# EAGLE board Cap-Audyn-Sn (EAGLE 3.55)

No outline drawn. Coordinates in mm, seen from the top.
Copper layers used: 

## Footprints (pad centres in the part's own frame; a part is rotated, then mirrored left to right if it is on the bottom)
*9 = drill 0.813 pad 1.778 octagon:  -12.5,0;  12.5,0
*11 = drill 0.813 pad 1.778 octagon:  -12.5,0;  12.5,0
*10 = drill 1.27 pad 2.54 octagon:  -15.5,0;  15.5,0
*12,5 = drill 1.27 pad 2.54 octagon:  -15.5,0;  15.5,0
*13 = drill 0.813 pad 1.778 octagon:  -15,0;  15,0
*14,5 = drill 1.27 pad 2.54 octagon:  -15.5,0;  15.5,0
*15 = drill 1.27 pad 2.54 octagon:  -15.5,0;  15.5,0
*15,5 = drill 1.27 pad 2.54 octagon:  -15.5,0;  15.5,0
*16 = drill 1.27 pad 2.54 octagon:  -18.5,0;  18.5,0
*19 = drill 1.27 pad 2.54 octagon:  -18.5,0;  18.5,0
*15,1 = drill 1.27 pad 2.54 octagon:  -20.5,0;  20.5,0
*17,5 = drill 1.27 pad 2.54 octagon:  -20.5,0;  20.5,0
*18 = drill 1.27 pad 2.54 octagon:  -21,0;  21,0
*20 = drill 1.27 pad 2.54 octagon:  -20.5,0;  20.5,0
*21,5 = drill 1.27 pad 2.54 octagon:  -20.5,0;  20.5,0
*21 = drill 1.27 pad 2.54 octagon:  -21,0;  21,0
*22 = drill 1.27 pad 2.54 octagon:  -21,0;  21,0
*24 = drill 1.27 pad 2.54 octagon:  -21,0;  21,0
*25 = drill 1.27 pad 2.54 octagon:  -21,0;  21,0

## Placement (x,y rotation side)
23*9  [*9]  25.4,238.76 0 top
23*11  [*11]  26.67,62.23 0 top
28*10  [*10]  57.15,238.76 0 top
28*12,5  [*12,5]  91.44,238.76 0 top
28*13  [*13]  58.42,62.23 0 top
28*14,5  [*14,5]  125.73,238.76 0 top
28*15  [*15]  160.02,238.76 0 top
28*15,5  [*15,5]  92.71,62.23 0 top
34*16  [*16]  30.48,218.44 0 top
34*19  [*19]  113.03,218.44 0 top
35*16  [*16]  72.39,218.44 0 top
38*15,1  [*15,1]  132.08,62.23 0 top
38*17,5  [*17,5]  156.21,218.44 0 top
38*18  [*18]  34.29,39.37 0 top
38*20  [*20]  33.02,194.31 0 top
38*21,5  [*21,5]  78.74,39.37 0 top
39*18  [*18]  34.29,142.24 0 top
39*20  [*20]  80.01,142.24 0 top
39*21  [*21]  78.74,194.31 0 top
39*22  [*22]  125.73,142.24 0 top
39*24  [*24]  34.29,115.57 0 top
39*25  [*25]  80.01,115.57 0 top
TQFP1  [-35SC]  0,0 0 top

## Library data of the parts
23*9 23*11 28*10 28*12,5 28*13 28*14,5 28*15 28*15,5 34*16 34*19 35*16 38*15,1 38*17,5 38*18 38*20 38*21,5 39*18 39*20-39*22 39*24 39*25 = cap-audy
TQFP1 = BLATT

## Text on the board
tPlace: 250Vdc | 100Vdc | 630Vdc